# Altium PCB MB_v1.PcbDoc (part 8 of 10)
Units mm, origin at the board's own origin, x right, y up, seen from the top; angles counter-clockwise.
Board outline 203 x 72 mm, 6 copper layers (Top Layer, Layer 3, Layer 1, Layer 2, Layer 4, Bottom Layer), stack 1.52 mm thick; 655 components, 569 nets, 2943 pads, 1834 vias.
Unrouted connection lines stored in the file: 31.
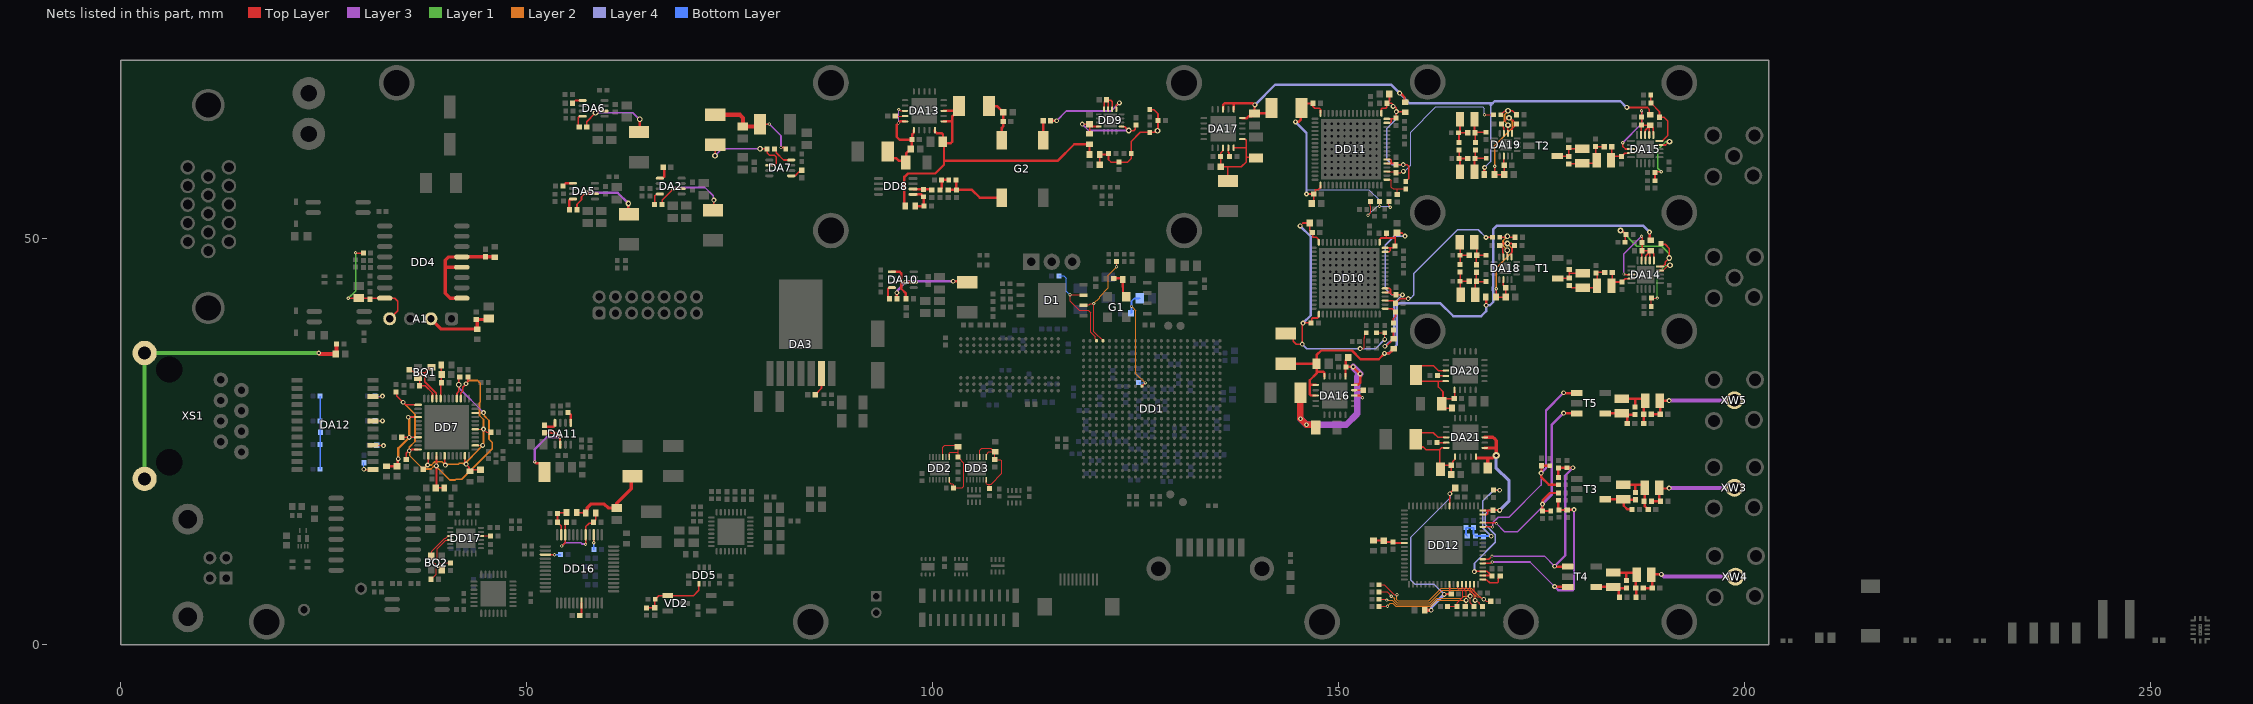
[diagram p11: the nets of this part, all layers, seen from the top]

## Via types
v1: diameter 0.4, hole 0.2, Top Layer to Bottom Layer, tented both sides, 654 vias
v2: diameter 0.8, hole 0.4, Top Layer to Bottom Layer, tented both sides, 489 vias
v3: diameter 0.6, hole 0.3, Top Layer to Bottom Layer, tented both sides, 354 vias
v4: diameter 0.7, hole 0.4, Top Layer to Bottom Layer, tented both sides, 144 vias
v5: diameter 0.8, hole 0.4, Top Layer to Bottom Layer, 87 vias
v6: diameter 0.9, hole 0.5, Top Layer to Bottom Layer, 45 vias
v7: diameter 0.66, hole 0.4, Top Layer to Bottom Layer, 25 vias
v8: diameter 0.7, hole 0.3, Top Layer to Bottom Layer, 13 vias
v9: diameter 0.5, hole 0.2, Top Layer to Bottom Layer, 12 vias
v10: diameter 0.5, hole 0.3, Top Layer to Bottom Layer, 5 vias
v11: diameter 1, hole 0.5, Top Layer to Bottom Layer, 2 vias
v12: diameter 0.4, hole 0.2, Top Layer to Bottom Layer, 2 vias
v13: diameter 0.9, hole 0.4, Top Layer to Bottom Layer, tented both sides, 2 vias

## Nets (pads, with @x,y where several pads share a name; then routed paths per layer and width w, separated by ;. In a path a pad name is that pad's centre, name@x,y a point inside that pad or via, vN(x,y) a via of type N, cw(c..) or ccw(c..) an arc to the next point about the centre after c; other vN are vias at no path point) (continued)
MIO5: D1.7 DD1.A3 R12.2 | length 12.7
  Top Layer w0.125: D1.7@118.731,43.086 v1(116.95,43.086) 116.95,42.3 118.06,41.19 119.185,41.19 119.524,40.851 119.524,38.451 120.05,37.925 120.05,37.662 120.212,37.499 DD1.A3@120.212,37.425
  Bottom Layer w0.125: R12.2@115.575,45.4 116.2,45.4 116.5,45.1 116.5,43.536 v1(116.95,43.086)
MIO6: D1.6 DD1.A4 R156.2 | length 12.7
  Top Layer w0.125: D1.6@118.6,41.88 119.327,41.88 119.447,42 v1(119.875,42) 119.877,41.998 119.877,38.56 DD1.A4@121.012,37.425 ; v1(122.675,46.525) R156.2@122.675,47.175
  Layer 2 w0.125: v1(119.875,42) 119.875,42.019 120.588,42.732 120.588,42.862 121.65,43.925 121.65,45.5 v1(122.675,46.525)
NetA1_2: A1.2 C76.2 C78.2 L10.2 | length 9.1
  Top Layer w0.4: A1.2@38.227,40.132 39.502,38.857 L10.2@43.942,38.857 43.942,39.926 C78.2@43.815,40.053 45.248,40.053 C76.2@45.339,40.144
NetA1_4: A1.4 C82.2 C83.2 DD4.16 R40.2 | length 15.9
  Top Layer w0.2: v1(28.05,42.65) 29.315,42.65 C82.2@29.337,42.672 30.607,42.672 C83.2@30.734,42.545 30.861,42.672 DD4.16@32.537,42.672 33.753,42.672 34.15,42.275 34.15,41.135 A1.4@33.147,40.132 ; v1(28.95,48.275) 29.004,48.275 29.065,48.214 R40.2@29.903,48.214
  Layer 1 w0.2: v1(28.05,42.65) 28.95,43.55 v1(28.95,48.275)
NetBQ1_1: BQ1.1 C175.2 DD7.46 | length 3.7
  Top Layer w0.2: BQ1.1@36.64,32.878 36.83,32.688 C175.2@36.83,31.877 37.513,31.877 38.413,30.977 DD7.46@38.413,30.302
NetBQ1_3: BQ1.3 C176.2 DD7.45 | length 6.9
  Top Layer w0.2: C176.2@35.56,33.861 35.773,33.648 36.012,33.648 36.182,33.478 37.415,33.478 37.465,33.428 ; BQ1.3@38.29,34.178 38.215,34.178 37.465,33.428 ; DD7.45@38.913,30.302 38.894,30.321 38.894,30.956 37.465,32.385 37.465,33.428
NetBQ2_1: BQ2.1 C297.1 DD17.21 | length 7
  Top Layer w0.125: C297.1@38.24,8.05 38.875,8.685 38.875,9.825 38.414,10.286 38.414,10.711 BQ2.1@38.25,10.875 38.314,10.939 38.314,11.464 39.95,13.1 40.06,13.1 40.335,13.375 DD17.21@40.6,13.375
NetBQ2_3: BQ2.3 C299.1 DD17.22 | length 6.1
  Top Layer w0.125: BQ2.3@39.55,9.225 39.506,9.269 39.506,9.814 ; DD17.22@40.6,12.875 40.05,12.875 38.987,11.812 38.987,10.333 39.506,9.814 ; C299.1@40.65,10.06 39.752,10.06 39.506,9.814
NetC12_2: C12.2 DA3.6 | length 2.9
  Top Layer w0.2: C12.2@85.56,30.775 86.34,31.555 DA3.6@86.34,33.37
NetC13_2: C13.2 C20.2 DD16.29 DD16.34 L49.2 | length 11
  Top Layer w0.2: v1@54.35,12.125 54.775,12.55 DD16.34@54.775,13.525 54.775,14.935 C13.2@54.915,15.075 ; v1(57.275,12.35) 57.275,14.5 57.725,14.95 58.14,14.95 C20.2@58.265,15.075 58.535,15.345 L49.2@58.535,16.225
  Layer 3 w0.2: v1(54.35,12.136) 54.75,12.536 56.675,12.536 56.822,12.388 57.237,12.388 v1(57.275,12.35)
NetC18_2: C18.2 DA2.5 | length 1.8
  Top Layer w0.3: DA2.5@66.418,57.451 66.428,57.441 66.774,57.441 66.95,57.617 66.95,58.7 C18.2@66.85,58.8
NetC21_2: C21.2 DA5.5 | length 1.4
  Top Layer w0.3: C21.2@54.488,56.484 54.828,56.824 DA5.5@55.726,56.824
NetC22_2: C22.2 DA6.5 | length 1.4
  Top Layer w0.2: C22.2@55.682,66.682 56.022,67.022 DA6.5@56.92,67.022
NetC23_2: C23.2 DA7.5 | length 1.6
  Top Layer w0.2: DA7.5@82.605,57.733 82.634,57.762 83.087,57.762 83.536,58.211 83.682,58.211 C23.2@83.902,58.431
NetC24_1: C24.1 DA2.2 L1.1 | length 10.8
  Top Layer w0.2: C24.1@66.704,54.19 66.704,54.754 v3(68.101,56.151) DA2.2@69.118,56.151 ; L1.1@72.975,53.5 73.077,53.602 v3(73.077,54.748)
  Layer 3 w0.2: v3(68.101,56.151) 68.209,56.151 68.358,56.3 71.975,56.3 73.001,55.274 73.001,54.824 v3(73.077,54.748)
NetC24_2: C24.2 DA2.8 | length 1.8
  Top Layer w0.2: C24.2@65.784,54.19 65.8,54.206 65.8,55.275 65.951,55.426 65.977,55.426 66.052,55.501 DA2.8@66.418,55.501
NetC26_1: C26.1 C119.2 DD16.35 L3.2 | length 4
  Top Layer w0.2: DD16.35@54.275,13.525 54.275,14.61 C26.1@53.81,15.075 C119.2@53.81,16.15 53.91,16.25 L3.2@54.92,16.25
NetC27_1: C27.1 DA5.2 L4.1 | length 10.9
  Top Layer w0.2: C27.1@56.218,53.563 56.218,54.233 56.768,54.783 56.768,55.153 57.265,55.65 57.46,55.65 57.558,55.553 58.397,55.553 DA5.2@58.426,55.524
  Top Layer w0.3: v4(62.55,54.325) 62.55,53.075 L4.1@62.625,53
  Layer 3 w0.3: v4(57.325,55.65) 61.225,55.65 v4(62.55,54.325)
NetC27_2: C27.2 DA5.8 | length 1.7
  Top Layer w0.3: C27.2@55.298,53.563 55.275,53.586 55.275,54.734 55.415,54.874 DA5.8@55.726,54.874
NetC28_1: C28.1 DA6.2 L5.1 | length 10.8
  Top Layer w0.2: C28.1@57.412,63.761 57.412,64.412 v4(58.5,65.5) 58.626,65.5 58.848,65.722 DA6.2@59.62,65.722
  Top Layer w0.3: L5.1@63.858,63.119 63.953,63.214 v4(63.953,64.703)
  Layer 3 w0.2: v4(58.5,65.5) 63.1,65.5 63.897,64.703 v4(63.953,64.703)
NetC28_2: C28.2 DA6.8 | length 1.8
  Top Layer w0.2: C28.2@56.492,63.761 56.375,63.878 56.375,64.893 56.554,65.072 DA6.8@56.92,65.072
NetC29_1: C29.1 DA7.2 L6.1 | length 11.7
  Top Layer w0.2: v4(73.225,60.225) 73.234,60.234 L6.1@73.234,61.56 ; v4(78.775,61.075) 78.798,61.052 C29.1@79.632,61.052 79.651,61.033 79.651,60.549 79.925,60.275 80.55,60.275 80.775,60.05 80.775,59.25 80.558,59.033 DA7.2@79.905,59.033
  Layer 3 w0.2: v4(73.225,60.225) 74.075,61.075 v4(78.775,61.075)
NetC29_2: C29.2 DA7.8 | length 2.8
  Top Layer w0.2: C29.2@80.552,61.052 80.757,60.847 80.757,60.593 81.667,59.683 DA7.8@82.605,59.683
NetC35_2: C35.2 L6.2 L7.1 R17.2 | length 12.1
  Top Layer w0.2: L7.1@78.75,64.1 79.875,64.1 v1(79.9,64.125) ; v1(81.35,61.225) 81.755,61.225 R17.2@81.928,61.052
  Top Layer w0.5: L6.2@73.234,65.26 76.29,65.26 76.663,64.887 C35.2@76.663,63.834 78.484,63.834 L7.1@78.75,64.1
  Layer 3 w0.2: v1(79.9,64.125) 81.35,62.675 v1(81.35,61.225)
NetC37_1: C37.1 L3.1 L49.1 L59.2 | length 10.4
  Top Layer w0.2: L3.1@56.18,16.25 56.205,16.225 L49.1@57.055,16.225
  Top Layer w0.4: L49.1@57.055,16.225 57.482,16.652 57.482,16.873 57.909,17.3 59.6,17.3 60.075,16.825 C37.1@61.125,16.825 61.125,17.4 62.9,19.175 62.9,20.575 L59.2@63.05,20.725
NetC43_2: C43.2 C46.2 DD1.H10 L8.2 | length 14.2
  Top Layer w0.2: DD1.H10@125.812,31.825 v1(126.213,32.226)
  Layer 2 w0.125: v1(124.525,41.65) 125.063,41.113 125.063,33.377 v1(126.213,32.226)
  Bottom Layer w0.125: C46.2@125.4,32.265 125.438,32.226 v1(126.213,32.226)
  Bottom Layer w0.2: L8.2@124.455,40.8 124.525,40.87 v1(124.525,41.65) 124.525,42.3 124.85,42.625 125.486,42.625 C43.2@125.533,42.672
NetC65_2: C65.2 G1.4 L9.2 | length 3.5
  Top Layer w0.3: C65.2@122.325,45.1 123.295,45.1 L9.2@123.445,44.95 123.445,44.045 123.475,44.015 123.475,43.245 G1.4@123.875,42.845
NetC77_2: C77.2 DD4.1 DD4.4 DD4.5 L11.2 | length 14.7
  Top Layer w0.4: DD4.1@42.037,42.672 40.603,42.672 40,43.275 40,46.525 ; DD4.4@42.037,46.482 40.043,46.482 40,46.525 ; L11.2@46.085,47.729 46.042,47.772 C77.2@44.942,47.772 44.932,47.762 42.047,47.762 DD4.5@42.037,47.752 40.427,47.752 40,47.325 40,46.525
NetC79_2: C79.2 DD2.1 DD2.3 DD2.14 L12.2 R33.2 | length 12.8
  Top Layer w0.125: DD2.3@101.275,23.095 101.275,24.287 101.525,24.538 102.995,24.538 L12.2@103.161,24.372 103.15,24.361 103.15,23.718 ; DD2.14@102.075,20.305 102.112,20.268 102.112,19.938 102.25,19.8 102.527,19.8 102.6,19.727 102.6,19.292 R33.2@102.595,19.287 103.662,19.287 103.875,19.5 103.875,22.36 C79.2@103.15,23.085 103.15,23.718 ; DD2.1@102.075,23.095 102.075,23.593 102.2,23.718 103.15,23.718
NetC80_2: C80.2 DD3.1 DD3.3 DD3.14 L13.2 R35.2 | length 11.3
  Top Layer w0.125: DD3.3@105.847,23.095 105.847,23.954 106.064,24.171 107.175,24.171 107.334,24.012 107.376,24.012 107.675,23.712 C80.2@107.675,22.785 108.44,22.785 108.525,22.7 108.525,21.075 107.225,19.775 107.025,19.775 ; DD3.14@106.647,20.305 106.647,19.848 106.72,19.775 107.025,19.775 ; DD3.1@106.647,23.095 106.684,23.133 106.684,23.448 106.966,23.729 L13.2@107.675,23.729 ; R35.2@107.025,19.225 107.025,19.775
NetC85_2: C85.2 DD5.1 R44.1 R45.1 VD2.1 | length 8.7
  Top Layer w0.2: R45.1@64.77,4.514 65.776,4.514 C85.2@65.786,4.524 65.786,5.519 R44.1@65.855,5.588 66.297,6.03 VD2.1@67.403,6.03 70.58,6.03 71.232,6.682 DD5.1@71.232,7.484
NetC89_2: C89.2 DA10.5 | length 4.6
  Top Layer w0.3: DA10.5@95.013,45.901 95.018,45.906 95.368,45.906 95.373,45.901 95.977,45.901 96.153,45.725 96.153,43.833 96.73,43.256 C89.2@96.73,42.599
NetC90_1: C90.1 DA10.2 L15.1 | length 11.2
  Top Layer w0.3: C90.1@95.618,42.599 v3(95.618,43.343) v3@95.625,43.35 ; v3(96.703,44.625) 96.707,44.621 97.694,44.621 DA10.2@97.698,44.616 ; v3(102.55,44.75) 102.566,44.734 104.199,44.734 L15.1@104.302,44.631
  Layer 3 w0.3: v3(95.618,43.343) 95.675,43.401 95.675,43.6 96.7,44.625 96.781,44.625 96.906,44.75 v3(102.55,44.75)
NetC90_2: C90.2 DA10.8 | length 1.8
  Top Layer w0.3: C90.2@94.698,42.599 94.528,42.769 94.528,42.942 94.525,42.945 94.525,43.804 94.677,43.956 94.988,43.956 DA10.8@94.998,43.966
NetC115_2: C115.2 DD17.10 | length 1.2
  Top Layer w0.125: DD17.10@44.4,13.375 C115.2@45.565,13.375
NetC129_2: C129.2 DA11.5 | length 1.4
  Top Layer w0.3: C129.2@55.118,28.602 55.458,28.262 DA11.5@55.458,27.316
NetC130_1: C130.1 DA11.2 L16.1 | length 10.4
  Top Layer w0.3: v1(51,22.5) 51.027,22.5 51.195,22.332 51.597,22.332 52.197,21.732 L16.1@52.197,21.267 ; C130.1@52.197,26.093 53.607,26.093 54.128,25.572 v1(54.128,25.526) 54.128,24.646 DA11.2@54.158,24.616
  Layer 3 w0.3: v1(51,22.5) 51,24.05 52.492,25.542 52.508,25.526 v1(54.128,25.526)
NetC130_2: C130.2 DA11.8 | length 1.8
  Top Layer w0.3: C130.2@52.197,27.013 52.36,26.85 53.353,26.85 53.498,26.995 53.498,27.306 DA11.8@53.508,27.316
NetC162_2: C162.2 DA12.1 | length 1.9
  Top Layer w0.125: v3(29.972,21.59) 30.011,21.551 DA12.1@31.091,21.551
  Bottom Layer w0.125: v3(29.972,21.59) C162.2@29.972,22.4
NetC163_2: C163.2 DA12.4 | length 2.2
  Top Layer w0.125: DA12.4@31.091,24.551 32.345,24.551 v3(32.385,24.511)
  Bottom Layer w0.125: C163.2@31.551,24.551 32.345,24.551 v3(32.385,24.511)
NetC164_2: C164.2 DA12.7 | length 2.1
  Top Layer w0.125: DA12.7@31.091,27.551 32.25,27.551 v3(32.258,27.559)
  Bottom Layer w0.125: C164.2@31.321,27.559 v3(32.258,27.559)
NetC165_2: C165.2 DA12.10 | length 2.1
  Top Layer w0.125: DA12.10@31.091,30.551 32.202,30.551 v3(32.258,30.607)
  Bottom Layer w0.125: C165.2@31.321,30.607 v3(32.258,30.607)
NetC166_2: C166.2 C167.2 C168.2 C170.2 DD7.1 DD7.12 DD7.16 DD7.34 DD7.40 L18.2 | length 45.3
  Top Layer w0.125: DD7.34@43.688,28.527 44.656,28.527 v3(44.704,28.575)
  Top Layer w0.2: C166.2@33.909,31.115 34.031,30.993 34.031,30.612 v3(34.798,29.845) 35.116,29.527 DD7.1@36.638,29.527 ; C168.2@35.179,22.812 35.179,23.574 35.481,23.876 35.668,23.876 35.819,24.027 DD7.12@36.638,24.027 ; DD7.16@38.913,23.252 38.913,19.39 C167.2@38.827,19.304 L18.2@39.883,19.304 ; DD7.40@41.413,30.302 41.432,30.321 41.432,30.967 41.656,31.191 v4(41.656,32.004) 41.656,32.814 C170.2@41.783,32.941
  Layer 3 w0.2: v4(41.656,32.004) 41.725,31.935 41.725,31.554 v3(44.704,28.575)
  Layer 2 w0.2: v3(34.798,29.845) 36.261,28.382 36.261,25.002 35.572,24.313 35.572,23.888 v3(35.56,23.876) 35.637,23.799 35.637,23.238 37.254,21.621 38.229,21.621 38.544,21.935 v3@38.826,21.935 ; v3(38.903,22.012) 38.903,21.909 40.539,20.273 41.237,20.273 41.342,20.378 42.04,20.378 45.789,24.127 45.789,24.887 45.375,25.301 45.375,27.595 44.781,28.19 44.781,28.498 v3(44.704,28.575)
NetC169_2: C169.2 C171.2 C172.2 C177.2 DD7.14 DD7.18 DD7.23 DD7.26 DD7.30 DD7.39 L19.2 | length 31.1
  Top Layer w0.125: DD7.26@43.688,24.527 v3(44.597,24.527) ; DD7.30@43.688,26.527 44.688,26.527 v3(44.699,26.538) 45.076,26.162 C177.2@45.641,26.162
  Top Layer w0.2: C171.2@37.303,21.577 C171.2@37.29,21.59 37.913,22.213 DD7.14@37.913,23.252 ; DD7.18@39.913,23.252 39.913,22.298 40.005,22.206 v3(40.005,22.098) ; DD7.39@41.913,30.302 41.913,30.988 42.147,31.222 42.147,31.68 42.545,32.078 42.545,32.179 42.799,32.433 C172.2@42.799,32.941 ; DD7.23@42.413,23.252 42.413,22.477 42.552,22.338 v3(42.552,22.229) 42.923,21.859 42.923,21.461 L19.2@43.053,21.331 43.277,21.555 C169.2@44.323,21.555
  Layer 2 w0.2: v3(37.821,22.121) 38.305,22.121 38.696,22.512 39.591,22.512 v3(40.005,22.098) 40.113,22.098 40.245,22.229 41.616,22.229 41.731,22.344 42.145,22.344 42.183,22.306 42.476,22.306 v3(42.552,22.229) 42.629,22.306 42.629,22.533 44.072,23.976 44.072,24.011 44.588,24.527 44.623,24.527 44.623,24.635 44.699,24.712 v3(44.699,26.538) 44.699,27.726 44.204,28.221 44.204,29.79 44.315,29.9 44.315,32.193 43.983,32.525 42.939,32.525 v3(42.545,32.131)
NetC173_1: C173.1 R82.2 R84.2 R85.2 R86.2 | length 9
  Bottom Layer w0.2: R86.2@24.58,21.59 R82.2@24.58,30.607
NetC174_2: C174.2 C179.2 DD7.4 DD7.9 L20.2 | length 11.3
  Top Layer w0.2: C179.2@34.623,25.527 v3(35.56,25.527) DD7.9@36.638,25.527 ; v3(35.433,28.002) 35.458,28.027 DD7.4@36.638,28.027
  Top Layer w0.3: L20.2@32.766,21.966 34.006,21.966 C174.2@34.036,21.936 34.143,22.043 34.143,22.818 v3(34.2,22.875)
  Layer 2 w0.3: v3(34.2,22.875) 34.2,24.167 v3(35.56,25.527) 35.56,27.794 35.433,27.921 v3(35.433,28.002)
NetC178_2: C178.2 C180.2 DD7.44 L21.2 | length 4.2
  Top Layer w0.2: DD7.44@39.413,30.302 39.413,32.126 C180.2@39.545,32.258 39.502,32.301 L21.2@39.502,34.417
NetC181_1: C181.1 R87.1 XS1.9 | length 40.2
  Top Layer w0.5: v3(24.406,35.918) 24.433,35.918 24.551,35.8 C181.1@26.475,35.8 26.575,35.9 26.575,36.825 R87.1@26.625,36.875
  Layer 1 w0.5: XS1.9@2.951,20.412 XS1.9@2.951,35.912 24.412,35.912 v3@24.425,35.925
NetC182_2: C182.2 C184.2 C185.2 DA13.13 DA13.15 DA13.16 L22.2 | length 14.6
  Top Layer w0.125: v1(95.85,65.9) 95.902,65.9 96.05,65.752 DA13.13@96.628,65.752
  Top Layer w0.3: L22.2@94.5,60.725 94.5,60.526 95.1,59.926 95.524,59.926 95.876,59.574 96.526,59.574 C182.2@96.725,59.375 96.749,59.399 96.749,60.499 97.025,60.775 97.05,60.775 97.3,61.025 C184.2@97.3,61.05 97.465,61.215 C185.2@97.465,62.2 ; DA13.15@96.628,64.452 96.027,64.452 v1(95.814,64.239) 95.6,64.025 95.6,62.525 95.95,62.175 97.44,62.175 C185.2@97.465,62.2 ; DA13.16@97.703,63.377 97.703,63.028 97.5,62.825 97.5,62.235 C185.2@97.465,62.2
  Layer 3 w0.125: v1(95.814,64.239) 95.85,64.275 v1(95.85,65.9)
NetC183_1: C183.1 DD8.1 L23.1 R99.2 | length 3.7
  Top Layer w0.3: DD8.1@97.605,55.455 98.614,55.455 R99.2@98.909,55.16 98.909,54.065 C183.1@98.957,54.017 L23.1@97.893,54.017
NetC186_2: C186.2 DA14.4 R89.1 | length 8.3
  Top Layer w0.125: R89.1@188.547,41.656 188.547,42.662 C186.2@188.557,42.672 188.56,42.675 v1(189.275,42.675)
  Top Layer w0.2: DA14.4@189.609,46.065 189.625,46.081 190,46.081 190.555,46.636 190.746,46.636 v4(190.842,46.731)
  Layer 1 w0.125: v1(189.275,42.675) 189.275,45.695 190.304,46.725 190.835,46.725 v4(190.842,46.731)
NetC187_2: C187.2 DA15.4 R92.1 | length 8
  Top Layer w0.2: R92.1@189,57.126 189,58.132 C187.2@189.01,58.142 189.117,58.25 v1(189.775,58.25) ; DA15.4@189.546,61.535 190.304,61.535 190.721,61.952 v4(190.787,61.952)
  Layer 1 w0.2: v1(189.775,58.25) 189.35,58.675 189.35,60.96 190.305,61.915 190.749,61.915 v4(190.787,61.952)
NetC188_2: C188.2 DA14.5 R90.1 R94.1 | length 13.8
  Top Layer w0.2: v4(184.75,51) 184.846,50.904 185.046,50.904 R94.1@185.425,50.525 185.375,50.475 185.325,50.425 R90.1@185.325,49.55 ; DA14.5@189.609,46.565 189.97,46.565 190.267,46.862 190.267,47.128 v4(190.764,47.625) 190.764,48.786 190.251,49.299 189.852,49.299 C188.2@189.748,49.403
  Layer 1 w0.2: v4(184.75,51) 184.85,51 186.775,49.075 189.825,49.075 190.76,48.14 190.76,47.629 v4(190.764,47.625)
NetC189_2: C189.2 DA15.5 R93.1 R95.1 | length 7.5
  Top Layer w0.2: R95.1@188.475,67.675 188.5,67.65 R93.1@188.5,66.7 189.566,65.634 C189.2@189.566,64.952 190.123,64.952 190.572,64.503 190.572,62.7 189.907,62.035 DA15.5@189.546,62.035
NetC190_1: C190.1 DD8.2 R99.1 | length 2.4
  Top Layer w0.3: DD8.2@97.605,56.105 98.864,56.105 R99.1@98.909,56.06 99.866,56.06 C190.1@99.925,56.001
NetC191_2: C191.2 DA13.14 | length 1.2
  Top Layer w0.125: C191.2@95.41,65.125 95.433,65.102 DA13.14@96.628,65.102
NetC192_2: C192.2 DA13.1 DA13.3 DA13.20 L23.2 L24.2 L25.2 L30.1 | length 42.8
  Top Layer w0.2: L30.1@119.348,60.372 L30.1@119.353,60.367
  Top Layer w0.3: L23.2@96.633,54.017 96.55,54.1 96.55,57.6 96.975,58.025 100.35,58.025 101.425,59.1 101.425,59.575 ; DA13.20@100.303,63.377 100.303,63.152 100.328,63.127 100.398,63.127 100.55,62.975 101.174,62.975 101.3,62.849 101.3,61.95 C192.2@101.275,61.925 ; DA13.1@101.378,64.452 102.45,64.452 ; DA13.3@101.378,65.752 102.69,65.752 102.982,66.044 102.982,65.544 102.674,65.236 102.626,65.236 102.45,65.06 102.45,64.452 ; L30.1@119.348,60.372 L25.2@119.348,61.642 118.317,61.642 118.3,61.625 117.475,61.625 115.425,59.575 101.425,59.575 ; C192.2@101.275,61.925 C192.2@101.425,61.775 ; C192.2@101.275,61.925 C192.2@101.425,61.775 ; 101.425,59.575 C192.2@101.425,61.775 ; C192.2@101.425,61.775 102.25,61.775 102.45,61.975 102.45,64.452
NetC193_1: C193.1 R98.2 R100.1 | length 2.2
  Top Layer w0.3: C193.1@100.941,56.001 101.137,56.197 R98.2@101.137,57.234 R100.1@102.015,57.234
NetC194_2: C194.2 C196.2 G2.4 L24.1 | length 5.6
  Top Layer w0.3: L24.1@106.974,66.336 107.019,66.291 107.998,66.291 108.44,65.849 108.465,65.849 108.715,65.599 C194.2@108.715,65.574 108.728,65.561 108.728,63.822 108.553,63.647 G2.4@108.553,62.145
NetC195_1: C195.1 C197.2 G2.1 R100.2 | length 8.3
  Top Layer w0.3: C195.1@101.957,56.001 104.874,56.001 105.84,55.035 G2.1@108.553,55.035 ; R100.2@102.915,57.234 102.915,56.059 C197.2@102.973,56.001
NetC198_2: C198.2 C202.2 DA14.6 DA14.7 DA14.8 DA14.9 DA14.13 L27.1 | length 14.8
  Top Layer w0.2: v1(185.175,45.65) 185.229,45.65 185.314,45.565 DA14.13@186.109,45.565 ; v1(187.35,50.3) 187.35,50.246 187.414,50.182 C202.2@187.414,49.53 C198.2@187.414,48.514 ; DA14.9@187.359,47.315 187.359,48.459 C198.2@187.414,48.514 ; DA14.8@187.859,47.315 187.859,47.9 188.158,48.199 188.158,48.274 188.403,48.519 L27.1@188.478,48.519 ; DA14.7@188.359,47.315 188.359,48.4 L27.1@188.478,48.519 ; DA14.6@188.859,47.315 188.859,48.138 188.798,48.199 188.798,48.274 188.553,48.519 L27.1@188.478,48.519 ; C198.2@187.414,48.514 187.419,48.519 L27.1@188.478,48.519
  Layer 3 w0.2: v1(185.175,45.65) 185.175,48.125 v1(187.35,50.3)
NetC199_2: C199.2 C203.2 DA15.6 DA15.7 DA15.8 DA15.9 DA15.13 L29.1 | length 14.6
  Top Layer w0.2: v1(185.025,61.825) 185.05,61.8 185.05,61.35 185.365,61.035 DA15.13@186.046,61.035 ; DA15.9@187.296,62.785 187.296,63.921 C199.2@187.359,63.984 ; v1(187.35,65.75) 187.35,65.009 C203.2@187.359,65 C199.2@187.359,63.984 ; DA15.8@187.796,62.785 187.798,62.787 187.798,63.359 188.103,63.664 188.103,63.739 L29.1@188.348,63.984 ; DA15.7@188.296,62.785 188.296,63.782 188.498,63.984 188.743,63.739 188.743,63.664 188.796,63.611 DA15.6@188.796,62.785 ; L29.1@188.423,63.984 C199.2@187.359,63.984
  Layer 3 w0.2: v1(185.025,61.825) 187.35,64.15 v1(187.35,65.75)
NetC200_2: C200.2 C208.2 DD9.8 DD9.13 L25.1 | length 11.9
  Top Layer w0.2: v3(118.45,64.1) 118.453,64.097 C200.2@119.359,64.097 ; L25.1@119.348,62.902 119.359,62.913 C200.2@119.359,64.097 ; DD9.8@120.496,63.808 119.648,63.808 C200.2@119.359,64.097 ; DD9.13@123.296,63.808 123.306,63.798 123.696,63.798 v4(124.174,63.32) 124.206,63.288 124.809,63.288 125.001,63.48 125.001,63.91 C208.2@125.074,63.983
  Layer 3 w0.2: v3(118.45,64.1) 119.23,63.32 v4(124.174,63.32)
NetC201_1: C201.1 DD9.1 | length 10.3
  Top Layer w0.2: DD9.1@122.646,65.958 122.646,66.421 122.95,66.725 v3(123.025,66.725)
  Top Layer w0.3: C201.1@114.56,64.525 v3(115.3,64.525)
  Layer 3 w0.2: v3(115.3,64.525) 116.5,65.725 122.025,65.725 v3(123.025,66.725)
NetC201_2: C201.2 G2.3 | length 2.4
  Top Layer w0.3: G2.3@113.633,62.145 113.633,64.518 C201.2@113.64,64.525
NetC204_2: C204.2 C206.2 DA14.14 L26.1 | length 4
  Top Layer w0.2: C206.2@183.731,45.847 183.731,44.578 183.858,44.451 184.063,44.656 C204.2@184.922,44.656 185.331,45.065 DA14.14@186.109,45.065
NetC205_2: C205.2 C207.2 DA15.14 L28.1 | length 3.8
  Top Layer w0.2: C207.2@183.676,61.317 183.676,60.1 183.702,60.126 C205.2@184.867,60.126 185.276,60.535 DA15.14@186.046,60.535
NetC206_1: C206.1 C210.2 C213.2 L26.2 L33.1 | length 6.4
  Top Layer w0.2: C213.2@178.445,44.244 178.748,43.941 L33.1@180.096,43.941 181.618,43.941 L26.2@181.873,44.196 181.873,45.642 C210.2@181.747,45.768 181.826,45.847 C206.1@182.811,45.847
NetC207_1: C207.1 C211.2 C214.2 L28.2 L34.1 | length 6.5
  Top Layer w0.2: C214.2@178.39,59.206 179.963,59.206 L34.1@180.041,59.284 181.436,59.284 L28.2@181.818,59.666 181.692,59.792 C211.2@181.692,61.365 181.74,61.317 C207.1@182.756,61.317
NetC209_1: C209.1 DD9.2 DD9.3 DD9.4 | length 4.2
  Top Layer w0.2: DD9.4@121.146,65.958 121.146,66.785 C209.1@121.459,67.098 ; DD9.3@121.646,65.958 121.646,66.911 C209.1@121.459,67.098 ; DD9.2@122.146,65.958 122.146,66.854 121.95,67.05 121.507,67.05 C209.1@121.459,67.098
NetC212_2: C212.2 C215.2 C359.2 L30.2 R101.1 R103.1 R105.1 R107.1 | length 15.5
  Top Layer w0.2: C212.2@120.583,59.097 120.613,59.127 L30.2@120.613,60.367 121.565,60.367 R107.1@121.692,60.494 121.692,59.733 121.995,59.43 C215.2@122.989,59.43 124.055,59.43 124.497,59.872 R105.1@124.497,60.494 124.497,61.972 125.617,63.092 R103.1@126.762,63.092 127.399,63.092 127.595,63.288 v4(127.73,63.288) 127.778,63.336 C359.2@127.778,64.558 127.778,65.399 127.28,65.897 R101.1@126.762,65.897
NetC213_1: C213.1 C216.2 L33.2 T1.5 | length 4.1
  Top Layer w0.2: T1.5@177.04,45.105 178.386,45.105 C213.1@178.445,45.164 178.445,45.681 ; C216.2@178.445,46.197 178.445,45.681 ; L33.2@180.096,45.721 178.486,45.721 178.445,45.681
NetC214_1: C214.1 C218.2 L34.2 T2.5 | length 4.3
  Top Layer w0.2: T2.5@176.985,60.194 177.053,60.126 C214.1@178.39,60.126 C218.2@178.39,61.238 178.564,61.064 L34.2@180.041,61.064
NetC217_2: C217.2 C220.2 C222.2 DA16.13 DA16.15 DA16.16 L31.2 | length 28
  Top Layer w0.2: DA16.13@151.958,30.677 152.698,30.677 v1(152.975,30.4)
  Top Layer w0.3: DA16.16@150.883,33.052 150.883,34.146 C222.2@150.932,34.195 ; C220.2@151.199,35.338 151.199,35.313 150.932,35.046 C222.2@150.932,34.195 ; DA16.15@151.958,31.977 152.402,31.977 152.675,32.25 v3(152.675,33.335) v3(151.815,34.195) C222.2@150.932,34.195
  Top Layer w0.8: L31.2@145.337,31.02 v3(145.337,27.813) v3(146.075,27.075) 147.05,27.075 147.225,26.9 C217.2@147.225,26.725
  Layer 3 w0.2: 152.308,30.425 152.95,30.425 v1(152.975,30.4)
  Layer 3 w0.8: v3(145.337,27.813) v3(146.075,27.075) 150.981,27.075 152.308,28.402 152.308,32.968 v3(152.675,33.335) v3(151.815,34.195)
NetC219_2: C219.2 C221.2 C223.2 DA17.13 DA17.15 DA17.16 L32.2 | length 13.7
  Top Layer w0.2: DA17.13@135.801,61.181 135.791,61.171 135.791,60.841 135.5,60.55 C223.2@135.499,60.127 C223.2@135.499,60.127 135.499,58.87 C221.2@135.512,58.857 136.35,58.857 ; L32.2@136.4,57.1 136.4,58.807 136.35,58.857 ; DA17.15@137.101,61.181 138.634,61.181 138.65,61.165 ; DA17.16@138.176,62.256 138.186,62.246 138.533,62.246 138.65,62.129 138.65,61.165 ; C219.2@139.875,59.925 139.792,60.008 138.684,60.008 138.65,60.042 ; 136.35,58.857 138.057,58.857 138.65,59.45 138.65,60.042 ; 138.65,60.042 138.65,61.165
NetC224_2: C224.2 C226.2 C228.2 C232.2 DA18.1 DA18.3 DA18.10 L35.2 | length 16.3
  Top Layer w0.2: v12(169.45,43.825) 169.45,42.826 L35.2@169.423,42.799 C232.2@170.606,42.799 170.619,42.812 C224.2@170.619,43.942 170.321,44.24 DA18.10@170.321,44.955 ; DA18.3@170.321,47.755 170.321,48.262 170.244,48.34 170.244,48.793 C226.2@169.888,49.149 170.108,49.369 170.191,49.369 170.225,49.403 v4(170.825,49.403) 171.377,49.403 171.411,49.369 171.494,49.369 C228.2@171.714,49.149 171.394,48.829 171.394,48.34 171.321,48.267 DA18.1@171.321,47.755
  Layer 2 w0.2: v12(169.45,43.825) 169.45,46.375 171.369,48.294 171.369,48.859 v4(170.825,49.403)
NetC225_2: C225.2 C227.2 C229.2 C233.2 DA19.1 DA19.3 DA19.10 L36.2 | length 16.7
  Top Layer w0.2: v12(169.275,58.925) 169.275,57.923 L36.2@169.241,57.888 C233.2@170.424,57.888 170.437,57.901 C227.2@170.437,59.031 170.381,59.087 DA19.10@170.381,60.168 ; DA19.3@170.381,62.968 170.381,63.687 170.307,63.761 170.307,63.891 C225.2@170.087,64.111 170.537,64.562 170.577,64.562 170.888,64.873 171.159,64.873 171.471,64.562 171.51,64.562 C229.2@171.961,64.111 171.39,63.541 171.39,62.978 DA19.1@171.381,62.968
  Layer 2 w0.2: v12(169.275,58.925) 169.275,61.475 171.447,63.647 171.447,64.377 171.024,64.8 v4(171.024,64.873)
NetC230_2: C230.2 DA16.14 | length 1.1
  Top Layer w0.2: DA16.14@151.958,31.327 153.063,31.327 C230.2@153.065,31.325
NetC231_2: C231.2 DA17.14 | length 1.1
  Top Layer w0.2: DA17.14@136.451,61.181 136.451,60.649 136.525,60.575 136.525,60.213 C231.2@136.611,60.127
NetC234_2: C234.2 DA16.1 DA16.3 DA16.20 L27.2 L35.1 L37.1 L39.1 | length 74.2
  Top Layer w0.3: L39.1@143.528,34.599 143.551,34.576 C234.2@147.321,34.576 ; DA16.3@147.208,30.677 146.651,30.677 146.475,30.853 146.475,31.95 ; DA16.1@147.208,31.977 146.502,31.977 146.475,31.95 ; DA16.20@148.283,33.052 148.283,33.442 148.107,33.618 147.353,33.618 147.321,33.65 ; L37.1@156.825,36.42 156.75,36.42 156.555,36.225 156.555,36.15 156.267,35.862 v3(155.687,35.862) 154.975,35.15 152.75,35.15 151.675,36.225 147.9,36.225 147.321,35.646 C234.2@147.321,34.576 ; L35.1@168.163,42.799 168.2,42.762 v3(168.2,41.8) ; v3(188.325,50.8) 188.382,50.743 188.382,49.875 L27.2@188.478,49.779 ; 146.475,31.95 146.475,32.55 147.321,33.396 147.321,33.65 ; 147.321,33.65 C234.2@147.321,34.576
  Layer 4 w0.3: v3@155.7,35.875 156.175,35.875 157.2,36.9 157.2,41.75 157.512,42.062 162.538,42.062 164.15,40.45 167.599,40.45 168.199,41.05 v3@168.199,41.799 ; v3(168.2,41.8) 168.207,41.793 168.668,41.793 169.1,42.225 169.1,43.539 169,43.639 169,44.011 169.1,44.111 169.1,51.175 169.525,51.6 187.525,51.6 v3(188.325,50.8)
NetC235_2: C235.2 DA17.1 DA17.3 DA17.20 L29.2 L36.1 L38.1 L40.1 | length 73.1
  Top Layer w0.2: v3(185.549,66.174) 185.572,66.15 188.075,66.15 188.312,65.913 188.312,65.355 L29.2@188.423,65.244
  Top Layer w0.3: DA17.3@135.801,65.931 135.801,66.499 135.977,66.675 139.444,66.675 139.644,66.475 v3(139.725,66.475) 139.675,66.425 C235.2@139.675,65.425 ; 137.1,66.625 137.1,66.398 137.101,66.399 DA17.1@137.101,65.931 ; DA17.20@138.176,64.856 138.731,64.856 138.95,65.075 139.325,65.075 C235.2@139.675,65.425 ; L40.1@141.75,66.1 141.75,66.025 141.15,65.425 C235.2@139.675,65.425 ; v3(157.55,67.925) 157.607,67.868 157.707,67.868 158.151,67.424 158.151,66.904 L38.1@158.25,66.805 ; L36.1@167.981,57.888 167.981,58.731 v3(168.012,58.762) v3@168.025,58.775
  Layer 4 w0.2: v3(168.012,58.762) 168.75,59.5 168.75,66.422
  Layer 4 w0.3: v3(139.725,66.475) 142.225,68.975 156.5,68.975 v3(157.55,67.925) 158.8,66.675 169.003,66.675 ; 168.75,66.422 169.003,66.675 ; v3(185.549,66.174) 185.501,66.174 184.75,66.925 169.253,66.925 169.003,66.675
NetC236_2: C236.2 DA18.2 R115.1 | length 5
  Top Layer w0.2: R115.1@169.878,50.165 170.563,50.165 170.69,50.292 170.96,50.292 171.081,50.171 C236.2@171.756,50.171 ; v4(170.819,48.578) 170.819,47.757 DA18.2@170.821,47.755
  Layer 2 w0.2: v4(170.819,48.578) 170.275,49.122 170.275,49.742 v4(170.825,50.292)
NetC237_2: C237.2 DA19.2 R116.1 | length 5.5
  Top Layer w0.2: R116.1@170.008,65.254 170.46,65.707 170.841,65.707 v4(170.897,65.762) 170.902,65.757 171.458,65.757 C237.2@171.961,65.254 ; DA19.2@170.881,62.968 170.889,62.976 170.889,63.976 v4(170.897,63.984)
  Layer 2 w0.2: v4(170.897,63.984) 170.897,64.057 170.474,64.48 170.474,65.266 170.897,65.689 v4(170.897,65.762)
NetC238_1: C238.1 C241.2 L42.1 R110.2 | length 4.1
  Top Layer w0.2: L42.1@166.748,49.58 167.042,49.286 C241.2@167.042,47.95 ; C238.1@167.001,46.786 167.001,47.909 C241.2@167.042,47.95 ; R110.2@168.175,47.95 C241.2@167.042,47.95
NetC238_2: C238.2 C240.2 L41.1 R109.2 | length 4
  Top Layer w0.2: L41.1@166.875,43.103 166.875,44.59 C240.2@167.035,44.75 ; C238.2@167.001,45.866 167.001,44.784 C240.2@167.035,44.75 ; R109.2@168.2,44.7 167.085,44.7 C240.2@167.035,44.75
NetC239_1: C239.1 C244.2 L44.1 R112.2 | length 4.3
  Top Layer w0.2: L44.1@166.772,64.698 166.772,63.125 C244.2@166.85,63.047 ; C239.1@166.898,61.856 166.85,61.904 C244.2@166.85,63.047 ; R112.2@168.2,63.1 166.902,63.1 C244.2@166.85,63.047
NetC239_2: C239.2 C243.2 L43.1 R111.2 | length 4.2
  Top Layer w0.2: L43.1@166.772,58.221 166.772,59.794 166.877,59.9 R111.2@168.225,59.9 ; C243.2@166.85,59.872 166.85,60.888 C239.2@166.898,60.936
NetC240_1: C240.1 C249.2 L41.2 R131.1 | length 4
  Top Layer w0.2: C249.2@164.842,45.897 164.993,45.746 R131.1@164.993,44.75 ; L41.2@165.095,43.103 164.993,43.205 R131.1@164.993,44.75 ; C240.1@166.115,44.75 R131.1@164.993,44.75
NetC241_1: C241.1 C249.1 L42.2 R132.1 | length 4
  Top Layer w0.2: C249.1@164.842,46.817 165,46.975 R132.1@165,47.95 ; L42.2@164.968,49.58 165,49.548 R132.1@165,47.95 ; C241.1@166.122,47.95 R132.1@165,47.95
NetC242_2: C242.2 C260.2 C264.2 C266.2 DD10.5 DD10.6 DD10.15 DD10.16 DD10.17 L37.2 R123.2 | length 32.2
  Top Layer w0.2: DD10.17@155.092,49.548 155.107,49.563 155.107,49.958 155.224,50.075 155.825,50.075 ; v3(155.725,36.75) 155.802,36.827 155.972,36.827 156.505,37.36 156.505,37.435 156.75,37.68 L37.2@156.825,37.68 156.8,37.705 R123.2@156.8,38.725 ; DD10.5@155.767,43.373 156.327,43.373 156.463,43.237 ; DD10.6@155.767,43.873 156.302,43.873 156.425,43.75 156.425,43.275 156.463,43.237 ; DD10.15@155.767,48.373 156.258,48.373 156.375,48.49 156.375,48.762 156.264,48.873 ; DD10.16@155.767,48.873 156.264,48.873 ; C260.2@155.926,50.673 155.92,50.667 155.92,50.17 155.825,50.075 ; v3(157.9,43.075) 157.143,43.075 C266.2@157.117,43.101 156.599,43.101 156.463,43.237 ; v3@158.225,50.325 157.85,50.7 C242.2@157.225,50.7 156.99,50.465 156.99,50.075 ; 155.825,50.075 156.99,50.075 ; 156.264,48.873 156.762,48.873 C264.2@156.99,49.101 156.99,50.075
  Layer 4 w0.2: v3(155.725,36.75) 156.85,37.875 156.85,42.025 v3(157.9,43.075) 156.55,43.075 155.767,43.858 155.767,49.192 156.887,50.312 v3(158.212,50.312)
NetC243_1: C243.1 C250.2 L43.2 R133.1 | length 3.8
  Top Layer w0.2: C250.2@164.866,60.936 164.877,60.925 R133.1@164.877,59.872 ; L43.2@164.992,58.221 164.992,59.757 R133.1@164.877,59.872 ; C243.1@165.93,59.872 R133.1@164.877,59.872
NetC244_1: C244.1 C250.1 L44.2 R134.1 | length 4.1
  Top Layer w0.2: C250.1@164.866,61.856 164.866,62.989 R134.1@164.808,63.047 ; L44.2@164.992,64.698 164.992,63.231 R134.1@164.808,63.047 ; C244.1@165.93,63.047 R134.1@164.808,63.047
NetC245_2: C245.2 C247.2 C252.2 C265.2 DD11.5 DD11.6 DD11.15 DD11.16 DD11.17 L38.2 R125.2 | length 23.9
  Top Layer w0.2: DD11.17@155.299,65.437 155.299,65.933 155.416,66.05 155.85,66.05 155.972,66.172 155.972,66.64 C247.2@156.007,66.675 ; DD11.5@155.974,59.262 156.5,59.262 ; DD11.6@155.974,59.762 156.408,59.762 156.525,59.645 156.525,59.287 156.5,59.262 ; DD11.15@155.974,64.262 155.989,64.277 156.385,64.277 156.502,64.394 156.502,64.762 ; DD11.16@155.974,64.762 156.502,64.762 ; C245.2@156.3,67.8 156.3,66.968 C247.2@156.007,66.675 ; v3(156.745,66.282) 156.842,66.379 156.842,66.383 156.55,66.675 C247.2@156.007,66.675 ; v3@156.844,66.381 157.138,66.087 157.138,65.662 v3(157.15,65.65) ; L38.2@158.25,65.545 158.145,65.65 v3(157.15,65.65) ; R125.2@158.3,57.025 158.675,57.4 158.675,58.9 158.45,59.125 v3(158,59.125) 157.978,59.103 C265.2@157.117,59.103 156.958,59.262 156.5,59.262 ; 156.502,64.762 157.03,64.762 157.135,64.867 157.135,65.635 v3(157.15,65.65)
  Top Layer w0.3: C245.2@156.11,67.99 C245.2@156.3,67.8
  Layer 4 w0.2: v3(157.15,65.65) 157.15,64.75 155.974,63.574 155.974,59.762 156.582,59.154 156.611,59.125 v3(158,59.125)
NetC246_2: C246.2 DD16.27 | length 1.9
  Top Layer w0.2: v1@58.275,12.525 DD16.27@58.275,13.525
  Bottom Layer w0.2: v1(58.275,12.536) 58.275,11.74 C246.2@58.315,11.7
NetC254_2: C254.2 DD10.3 R115.2 | length 19.1
  Top Layer w0.2: DD10.3@155.767,42.373 156.702,42.373 C254.2@157.038,42.037 157.438,42.437 157.438,42.44 157.573,42.575 158.107,42.575 158.157,42.625 v3@158.625,42.625 ; v3@168.2,50.15 168.215,50.165 R115.2@168.978,50.165
  Layer 4 w0.2: v3(158.612,42.612) 158.689,42.689 158.939,42.689 159.3,43.05 159.3,45.71 164.69,51.1 167.224,51.1 v3(168.187,50.137)
NetC255_2: C255.2 DD10.1 R123.1 | length 2.9
  Top Layer w0.2: DD10.1@155.767,41.373 156.642,41.373 C255.2@157.04,40.975 157.04,40.415 156.8,40.175 R123.1@156.8,39.625
NetC256_2: C256.2 C262.2 C267.2 DD10.32 DD10.49 L39.2 R117.1 R119.1 R124.1 | length 40.7
  Top Layer w0.125: v3(152.672,36.449) 152.685,36.462 153.086,36.462 153.2,36.576 153.2,37.785 153.238,37.822 153.238,38.216 R124.1@153.434,38.412 ; R119.1@154.704,38.412 R117.1@155.72,38.412 v3(155.72,37.592)
  Top Layer w0.2: L39.2@143.528,38.299 143.811,38.299 144.461,37.649 144.461,37.366 144.827,37 v3(145.55,37) 145.55,39.392 145.65,39.492 v3(145.65,39.6) 145.674,39.624 C267.2@146.624,39.624 146.702,39.702 146.702,40.127 146.8,40.225 147.434,40.225 147.552,40.342 147.552,40.351 147.592,40.391 DD10.49@147.592,40.698 ; v3@145.3,51.575 145.65,51.925 C256.2@146.489,51.925 146.489,51.051 C262.2@146.79,50.75 146.835,50.705 146.835,50.247 146.907,50.175 147.3,50.175 147.552,49.923 147.552,49.895 147.592,49.855 DD10.32@147.592,49.548
  Layer 4 w0.2: v3(145.55,37) 146.101,36.449 v3(152.672,36.449) 154.577,36.449 v3(155.72,37.592)
  Layer 4 w0.3: v3(145.287,51.562) 146.611,50.238 146.611,40.561 v3(145.65,39.6)
NetC257_2: C257.2 DD11.3 R116.2 | length 19.8
  Top Layer w0.125: DD11.3@155.974,58.262 156.973,58.262 C257.2@157.117,58.118 157.702,58.118 157.877,58.293 v3(158.006,58.293) ; v1(168,65.25) 168.004,65.254 R116.2@169.108,65.254
  Layer 4 w0.125: v3(158.006,58.293) 158.135,58.293 158.273,58.432 158.307,58.432 158.9,59.025 158.9,63.125 162.025,66.25 167.775,66.25 168,66.025 v1(168,65.25)
NetC258_2: C258.2 DD11.1 R125.1 | length 4
  Top Layer w0.125: DD11.1@155.974,57.262 156.004,57.232 156.443,57.232 156.525,57.15 156.525,56.35 156.75,56.125 157.2,56.125 ; C258.2@157.25,55.435 157.25,56.075 157.2,56.125 ; R125.1@158.3,56.125 157.2,56.125
NetC259_2: C259.2 C263.2 C269.2 DD11.32 DD11.49 L40.2 R118.1 R121.1 R127.1 | length 36.3
  Top Layer w0.125: v1(153.65,52.875) 153.966,53.191 153.966,53.961 153.942,53.985 R127.1@153.942,54.587 ; v1(155.075,54) 155.075,54.577 R121.1@155.085,54.587 ; R118.1@156.228,54.587 156.228,54.086 156.4,53.914 v1(156.4,53.875)
  Top Layer w0.2: L40.2@145.115,65.715 146.047,66.647 146.85,66.647 146.85,66.311 147.112,66.049 147.682,66.049 147.799,65.932 DD11.32@147.799,65.437 ; v3(146.075,55.5) 146.076,55.501 C263.2@146.98,55.501 ; C259.2@146.7,54.35 146.98,54.63 C263.2@146.98,55.501 ; DD11.49@147.799,56.587 147.799,56.289 147.654,56.145 147.654,56.138 147.537,56.021 147.167,56.021 147.146,56 147.146,55.667 C263.2@146.98,55.501
  Top Layer w0.3: v3(144.725,64.375) 144.768,64.418 145.143,64.418 145.35,64.625 145.35,66 L40.2@145.45,66.1
  Layer 4 w0.125: 146.075,56.025 153.75,56.025 155.075,54.7 v1(155.075,54) ; v1(153.65,52.875) 154.775,54 v1(155.075,54) ; v1(156.4,53.875) 156.326,53.875 156.201,54 v1(155.075,54)
  Layer 4 w0.3: v3(144.725,64.375) 146.075,63.025 146.075,56.025 v3(146.075,55.5)
NetC261_2: C261.2 DD16.7 | length 1.6
  Top Layer w0.2: C261.2@56.56,3.575 56.775,3.79 DD16.7@56.775,5.125
NetC268_2: C268.2 DD16.39 | length 1.9
  Top Layer w0.2: DD16.39@52.325,11.075 v1(53.45,11.075)
  Bottom Layer w0.2: v1(53.45,11.075) C268.2@54.19,11.075
NetC270_2: C270.2 C271.2 C272.2 DA20.13 DA20.15 DA20.16 L45.1 | length 15.6
  Top Layer w0.2: C270.2@162.725,29.658 162.725,29.604 163.2,29.129 C271.2@164.167,29.129 ; DA20.15@163.251,32.439 162.325,32.439 ; DA20.13@163.251,33.739 162.336,33.739 161.75,34.325 160.21,34.325 159.56,33.675 159.56,32.91 160.031,32.439 162.325,32.439 ; DA20.16@164.326,31.364 164.326,30.38 164.434,30.272 163.018,30.272 162.892,30.398 162.892,31.158 162.325,31.725 162.325,32.439
NetC273_2: C273.2 C275.2 R137.1 R138.1 R144.1 R145.1 | length 13.3
  Top Layer w0.2: R145.1@169.125,19.025 169.825,19.025 v3@169.85,19.05
  Layer 4 w0.2: v3(168.839,13.336) 167.785,14.39 167.785,17.685 169.125,19.025 169.844,19.025 v3(169.864,19.004)
  Bottom Layer w0.2: C273.2@165.878,13.367 165.725,13.521 R138.1@165.725,14.4 R137.1@166.65,14.4 166.65,13.605 C275.2@166.887,13.367 167.843,13.367 R144.1@167.878,13.332 167.921,13.375 v3@168.8,13.375
NetC274_2: C274.2 C276.2 DD12.8 DD12.47 L46.2 | length 25.6
  Top Layer w0.2: v3@163.002,6.223 C276.2@163.896,6.223 163.71,6.409 DD12.47@163.71,7.434 ; DD12.8@163.71,17.084 163.71,18.623 164.066,18.979 164.091,18.979 164.391,19.279 C274.2@164.391,19.329
  Top Layer w0.4: L46.2@160.635,4.225 v3(161.43,4.225)
  Layer 4 w0.2: v3(163.039,6.186) 161.791,7.434 159.441,7.434 158.9,7.975 158.9,13.2 163.749,18.049 v3(163.749,18.584)
  Layer 4 w0.4: v3(161.43,4.225) 161.468,4.263 161.468,4.615 v3(163.039,6.186)
NetC277_2: C277.2 DD12.49 R143.2 | length 4.6
  Top Layer w0.125: R143.2@163.467,4.699 163.469,4.697 C277.2@164.61,4.697 164.629,4.716 164.629,5.131 165.324,5.825 165.324,6.621 165.213,6.731 164.864,6.731 164.71,6.885 DD12.49@164.71,7.434
NetC278_2: C278.2 DA20.14 | length 1.1
  Top Layer w0.2: C278.2@162.197,33.147 162.255,33.089 DA20.14@163.251,33.089
NetC279_2: C279.2 DD12.50 R142.2 | length 14.3
  Top Layer w0.125: R142.2@155.027,4.699 156.024,4.699 v1(156.05,4.725) ; DD12.50@165.21,7.434 165.21,7.134 165.574,6.77 165.574,6.656 165.749,6.481 165.749,5.448 v3(165.741,5.44) 165.741,4.812 C279.2@165.626,4.697
  Layer 2 w0.125: v1(156.05,4.725) 156.4,5.075 156.695,5.075 157.071,4.7 161.434,4.7 162.174,5.44 v3(165.741,5.44)
NetC281_2: C281.2 DD12.51 R141.2 | length 15.1
  Top Layer w0.125: R141.2@155.027,5.588 155.763,5.588 155.876,5.475 v1(155.95,5.475) ; DD12.51@165.71,7.434 165.734,7.41 165.734,7.004 166.237,6.501 v3(166.237,5.969) 166.261,5.945 166.261,5.159 C281.2@166.723,4.697
  Layer 2 w0.125: v1(155.95,5.475) 156.614,5.475 157.164,4.925 161.341,4.925 162.139,5.723 165.222,5.723 165.467,5.969 v3(166.237,5.969)
NetC283_2: C283.2 DD12.52 R140.2 | length 17.5
  Top Layer w0.125: R140.2@155.027,6.477 156.01,6.477 v1(156.531,5.956) ; DD12.52@166.21,7.434 166.21,6.882 166.487,6.605 166.487,6.408 166.724,6.171 166.724,5.753 166.747,5.73 166.747,5.624 167.019,5.351 167.128,5.351 167.333,5.146 167.333,5.028 167.406,4.955 167.482,4.955 C283.2@167.739,4.697
  Layer 2 w0.125: v1(156.531,5.956) 156.606,5.956 156.778,5.784 156.891,5.784 156.964,5.711 156.964,5.443 157.257,5.15 161.247,5.15 162.782,6.684 166.176,6.684 166.838,6.022 v3(166.838,5.442)
NetC284_2: C284.2 C288.2 C291.2 DA21.13 DA21.15 DA21.16 L47.2 | length 15.4
  Top Layer w0.2: DA21.15@163.289,24.227 162.702,24.227 162.475,24 ; DA21.13@163.289,25.527 162.273,25.527 161.7,26.1 160.18,26.1 159.53,25.45 159.53,24.99 160.18,24.34 160.463,24.34 160.803,24 162.475,24 ; C288.2@163.9,20.95 163.913,20.963 C291.2@163.913,22.093 ; DA21.16@164.364,23.152 164.354,23.142 164.354,22.804 164.11,22.56 164.11,22.29 C291.2@163.913,22.093 ; 162.475,24 162.475,21.7 C284.2@162.575,21.6 162.575,21.618 163.05,22.093 C291.2@163.913,22.093
NetC286_2: C286.2 C289.2 DD12.27 L48.2 | length 3.9
  Top Layer w0.25: L48.2@154.323,12.822 154.353,12.792 C286.2@155.593,12.792 155.733,12.652 C289.2@156.736,12.652 156.879,12.509 DD12.27@158.135,12.509
NetC287_2: C287.2 DD12.53 R139.2 | length 18.9
  Top Layer w0.125: R139.2@155.027,7.366 155.634,7.366 156.875,6.125 v1(157.225,6.125) ; DD12.53@166.71,7.434 166.71,6.82 166.737,6.793 166.737,6.536 166.974,6.298 166.974,5.972 167.084,5.862 167.509,5.862 167.783,5.588 167.969,5.588 168.223,5.334 C287.2@168.77,5.334
  Layer 2 w0.125: v1(157.225,6.125) 157.189,6.089 157.189,5.536 157.35,5.375 161.154,5.375 162.688,6.909 166.364,6.909 167.594,5.679 167.821,5.679 v3(167.912,5.588)
NetC290_2: C290.2 DD12.55 | length 2.9
  Top Layer w0.2: DD12.55@167.785,8.009 167.795,7.999 168.251,7.999 168.65,7.6 169.583,7.6 169.7,7.717 169.7,8.093 169.724,8.117 169.724,8.21 C290.2@169.944,8.43
NetC292_2: C292.2 DA21.14 | length 1.1
  Top Layer w0.2: C292.2@162.149,24.892 162.164,24.877 DA21.14@163.289,24.877
NetC293_2: C293.2 C294.2 C295.2 DA21.1 DA21.3 DA21.20 DD12.56 DD12.57 DD12.71 DD12.72 | length 34.1
  Top Layer w0.2: v3@166.741,9.009 DD12.57@167.785,9.009 168.346,9.009 168.525,8.83 168.528,8.83 C295.2@168.849,8.509 ; DA21.20@166.964,23.152 166.964,22.998 166.987,22.975 DA21.20@167.039,22.975 ; DD12.56@167.785,8.509 C295.2@168.849,8.509 ; DD12.71@167.785,16.009 DD12.71@167.785,16.009 168.285,16.01 168.404,16.129 168.404,16.509 ; DD12.72@167.785,16.509 168.404,16.509 ; C295.2@168.928,8.43 C295.2@168.849,8.509 ; v3@169.825,16.575 169.089,16.575 C294.2@169.055,16.541 169.023,16.509 168.404,16.509
  Top Layer w0.4: DA21.20@167.039,22.975 168.25,22.975 ; DA21.1@168.039,24.227 169.45,24.227 ; DA21.3@168.039,25.527 169.048,25.527 169.249,25.325 169.45,25.125 169.45,24.227 ; C293.2@168.4,21.75 168.4,22.825 168.25,22.975 ; 168.25,22.975 168.99,22.975 169.315,23.3 v13(169.45,23.3) 169.45,24.227
  Layer 4 w0.2: v3(166.764,8.986) 166.764,10.014 169.339,12.589 169.339,13.543 168.085,14.797 168.085,16.06 168.561,16.536 v3(169.864,16.536)
  Layer 4 w0.4: v13(169.45,23.3) 169.414,23.264 169.414,21.786 171.025,20.175 171.025,17.697 v3(169.864,16.536)
NetC296_2: C296.2 DD12.68 R147.1 R157.2 T5.3 | length 28.8
  Top Layer w0.2: DD12.68@167.785,14.509 168.966,14.509 v1(169,14.475)
  Top Layer w0.3: R147.1@176.04,22.029 176.03,22.019 C296.2@175.024,22.019 175.024,21.174 v3(174.975,21.125) 174.975,20.65 175.94,19.685 R157.2@177.114,19.685 ; v3@177.7,30.975 177.707,30.968 T5.3@179.35,30.968
  Layer 3 w0.2: v1(169,14.475) 169,14.991 169.709,15.7 171.025,15.7 174.975,19.65 v3(174.975,21.125)
  Layer 3 w0.3: v3(174.975,21.125) 175.575,21.725 175.575,28.85 v3(177.741,31.016)
NetC298_2: C298.2 DD12.69 R148.1 R153.2 T5.1 | length 28
  Top Layer w0.2: DD12.69@167.785,15.009 169.312,15.009 169.421,14.9 v1(169.475,14.9)
  Top Layer w0.3: R148.1@176.167,16.452 175.161,16.452 C298.2@175.151,16.462 v3(175.15,17.3) v3(175.15,17.3) 175.155,17.305 175.155,17.755 176.069,18.669 R153.2@177.114,18.669 ; v3@177.707,28.468 T5.1@179.35,28.468
  Layer 3 w0.2: v1(169.475,14.9) 170.475,13.9 172.075,13.9 175.088,16.913 175.088,17.238 v3(175.15,17.3)
  Layer 3 w0.3: v3(175.15,17.3) 176.275,18.425 176.275,27.05 v3(177.741,28.516)
NetC301_2: C301.2 DD12.60 R149.1 R154.2 T4.3 | length 27.2
  Top Layer w0.2: DD12.60@167.785,10.509 168.534,10.509 v1(168.925,10.9)
  Top Layer w0.3: v3@176.597,9.606 T4.3@178.24,9.606 ; R154.2@177.114,20.574 177.114,21.742 C301.2@177.137,21.765 177.147,21.775 R149.1@178.153,21.775 v3(178.9,21.775)
  Layer 3 w0.2: v1(168.925,10.9) 175.385,10.9 v3(176.631,9.654)
  Layer 3 w0.3: v3(176.631,9.654) 177.95,10.973 177.95,20.825 v3(178.9,21.775)
NetC303_2: C303.2 DD12.59 R150.1 R152.2 T4.1 | length 27.3
  Top Layer w0.2: DD12.59@167.785,10.009 168.733,10.009 168.899,10.175 v1(168.95,10.175)
  Top Layer w0.3: v3@176.597,7.106 T4.1@178.24,7.106 ; R152.2@177.114,17.78 177.114,16.648 R150.1@177.183,16.579 178.189,16.579 C303.2@178.199,16.589 178.235,16.625 v3(179.025,16.625)
  Layer 3 w0.2: v1(168.95,10.175) 173.61,10.175 v3(176.631,7.154)
  Layer 3 w0.3: v3(176.631,7.154) 177.102,6.683 178.849,6.683 179.025,6.859 v3(179.025,16.625)
NetC306_2: C306.2 C307.2 L50.1 T3.5 | length 5.6
  Top Layer w0.3: T3.5@182.898,17.907 L50.1@185.072,17.907 ; C306.2@186.184,16.637 186.171,16.65 185.6,16.65 185.151,17.099 185.151,17.828 C307.2@186.596,17.828
NetC307_1: C307.1 C314.2 C315.2 L50.2 L53.1 | length 6.7
  Top Layer w0.3: L50.2@185.072,19.687 186.65,19.687 ; C307.1@186.596,18.748 186.596,19.633 186.65,19.687 ; C314.2@188.168,16.637 187.744,17.061 187.744,17.569 C315.2@187.66,17.653 187.738,17.731 L53.1@187.738,19.304 187.738,19.327 187.378,19.687 186.65,19.687
NetC308_2: C308.2 C312.2 L51.1 T4.5 | length 4.8
  Top Layer w0.3: T4.5@181.78,7.106 183.814,7.106 L51.1@183.835,7.085 ; L51.1@184.193,6.959 C312.2@185.486,6.959 ; L51.1@184.193,7.085 184.553,6.725 184.553,5.908 C308.2@184.645,5.816
NetC309_2: C309.2 C313.2 L52.1 T5.5 | length 5.5
  Top Layer w0.3: T5.5@182.89,28.468 184.882,28.468 L52.1@184.899,28.485 ; C309.2@185.582,27.215 185.582,28.125 185.222,28.485 L52.1@184.899,28.485 ; C313.2@186.55,28.327 185.057,28.327 L52.1@184.899,28.485
NetC312_1: C312.1 C316.2 C318.2 L51.2 L54.1 | length 6.8
  Top Layer w0.3: L51.2@183.835,8.865 185.475,8.865 ; C312.1@185.486,7.879 185.486,8.854 185.475,8.865 ; C316.2@186.677,5.816 186.677,6.911 C318.2@186.629,6.959 186.629,8.736 186.5,8.865 185.475,8.865
NetC313_1: C313.1 C317.2 C319.2 L52.2 L55.1 | length 7
  Top Layer w0.3: L52.2@184.899,30.265 186.475,30.265 ; C313.1@186.55,29.247 186.55,30.19 186.475,30.265 ; C317.2@187.614,27.215 C319.2@187.614,28.358 187.614,29.803 L55.1@187.82,30.009 187.564,30.265 186.475,30.265
NetC315_1: C315.1 C320.2 L53.2 XW3.1 | length 12
  Top Layer w0.3: C315.1@188.58,17.653 C320.2@189.692,17.653 189.518,17.827 L53.2@189.518,19.304 ; L53.2@189.587,19.227 v3@190.696,19.227
  Layer 3 w0.5: v3@190.773,19.304 XW3.1@198.78,19.304
  other v3: 190.737,19.268
NetC318_1: C318.1 C321.2 L54.2 XW4.1 | length 13.3
  Top Layer w0.3: C318.1@187.549,6.959 C321.2@188.661,6.959 L54.2@188.661,8.292 ; L54.2@188.535,8.292 188.893,8.65 v3(189.8,8.65) ; L54.2@188.535,8.61 L54.2@188.661,8.484
  Layer 3 w0.5: v3(189.8,8.65) 189.827,8.65 190.108,8.369 XW4.1@198.905,8.369
NetC319_1: C319.1 C322.2 L55.2 XW5.1 | length 12
  Top Layer w0.3: C319.1@188.534,28.358 C322.2@189.646,28.358 189.646,29.963 L55.2@189.6,30.009 190.709,30.009 v3(190.75,30.05)
  Layer 3 w0.3: v3(190.75,30.05) v3@190.786,30.086
  Layer 3 w0.5: v3@190.786,30.086 XW5.1@198.793,30.086